# Altium PCB PCB2.PcbDoc
Units mm, origin at the board's own origin, x right, y up, seen from the top; angles counter-clockwise.
Board outline 32.64 x 44.58 mm, 2 copper layers (Top Layer, Bottom Layer), stack 1.1 mm thick; 13 components, 11 nets, 43 pads, 10 vias.
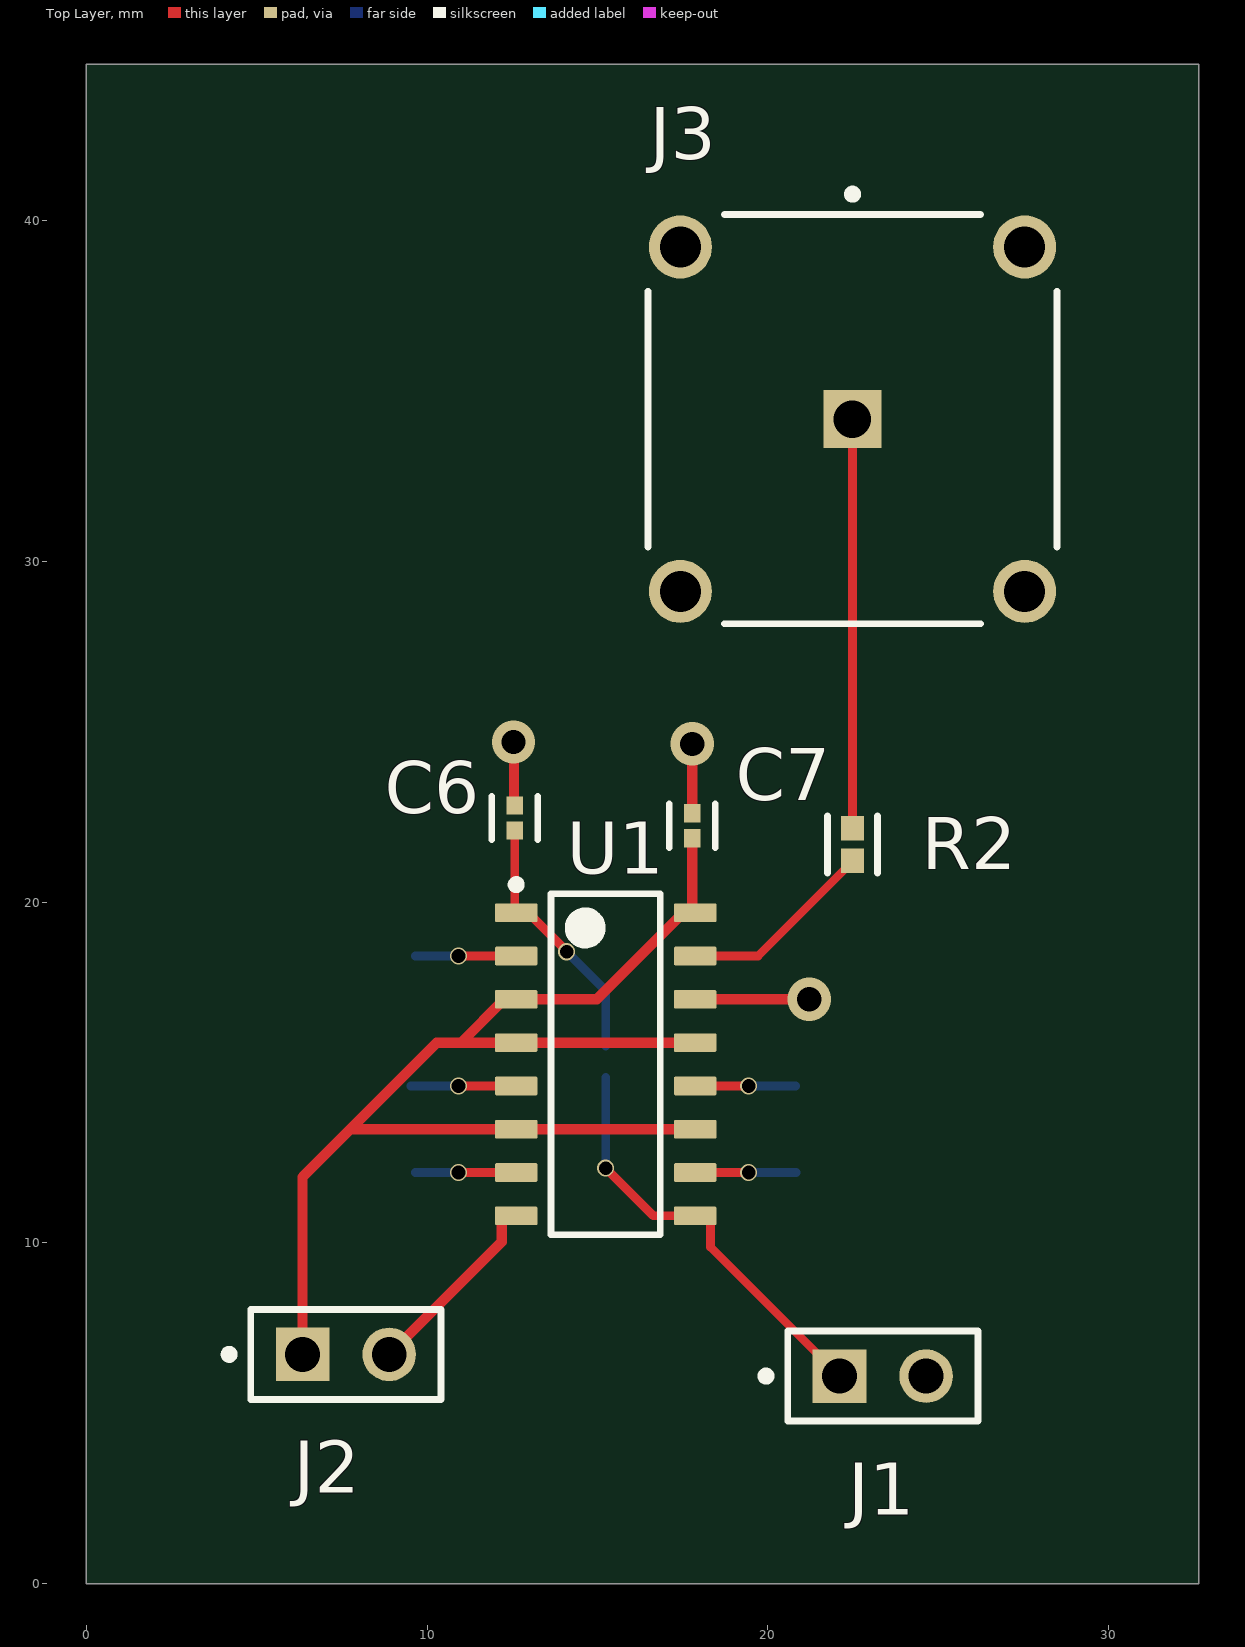
[diagram p0: Top Layer view]
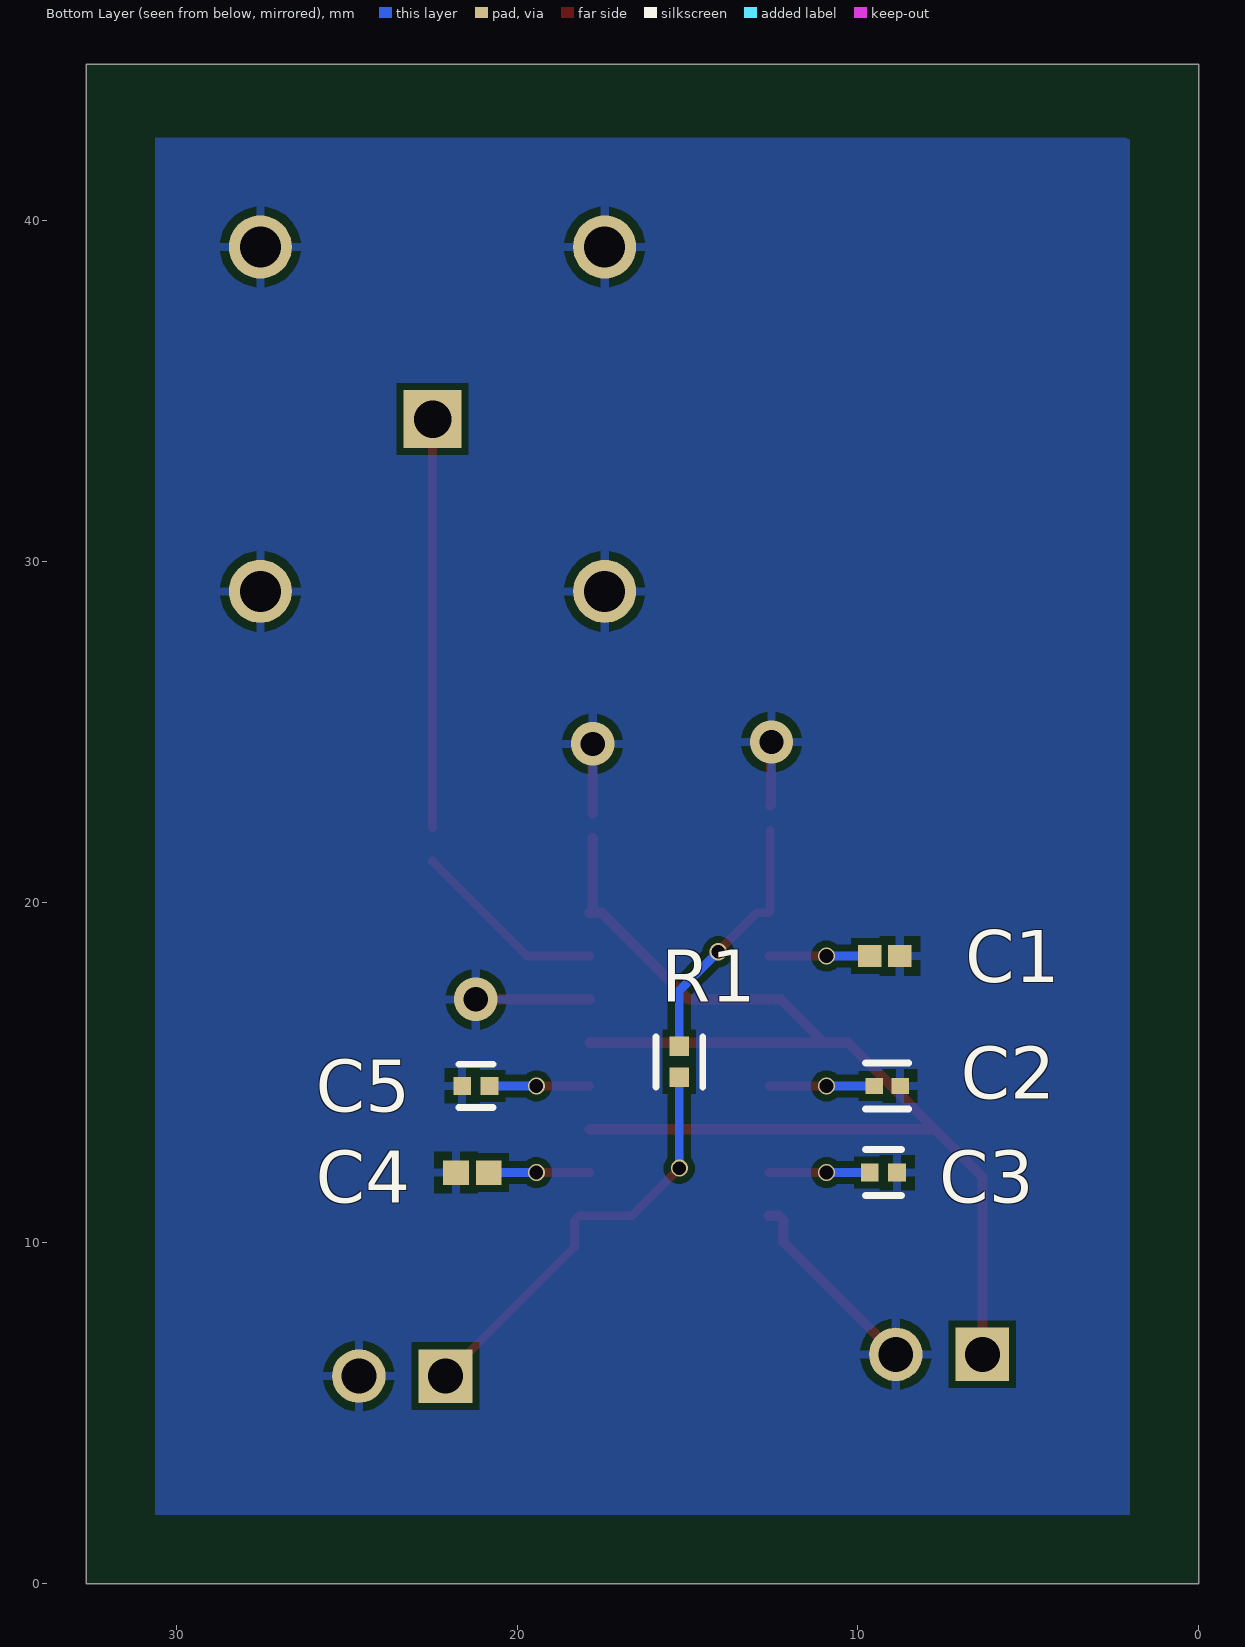
[diagram p1: Bottom Layer view, seen from below]
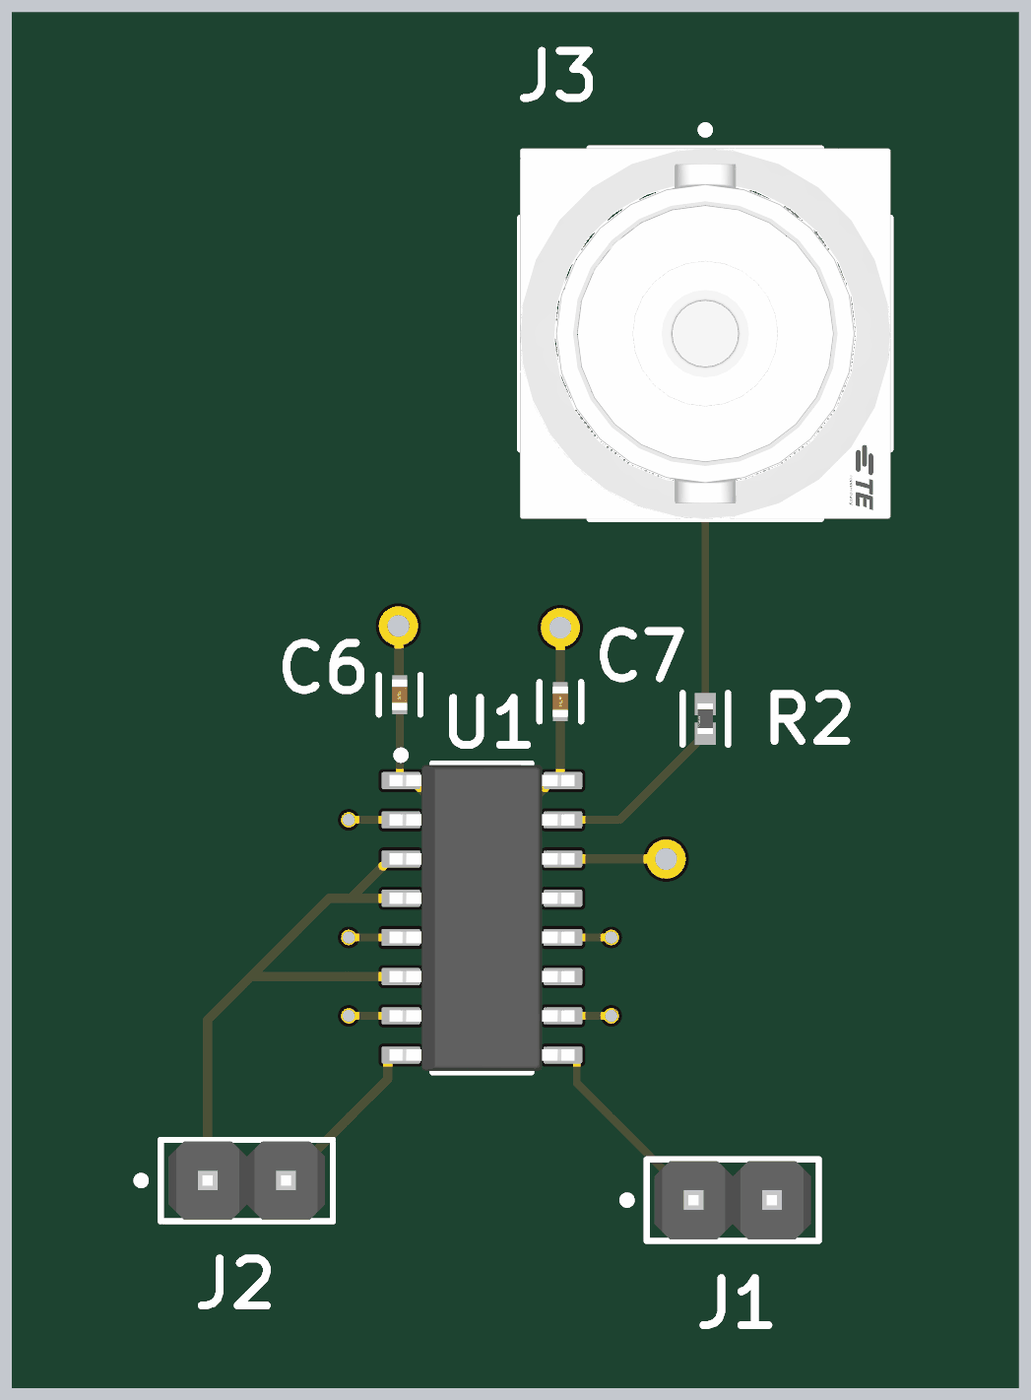
[diagram p2: 3D render of the assembled board from above, using the file's embedded part models]
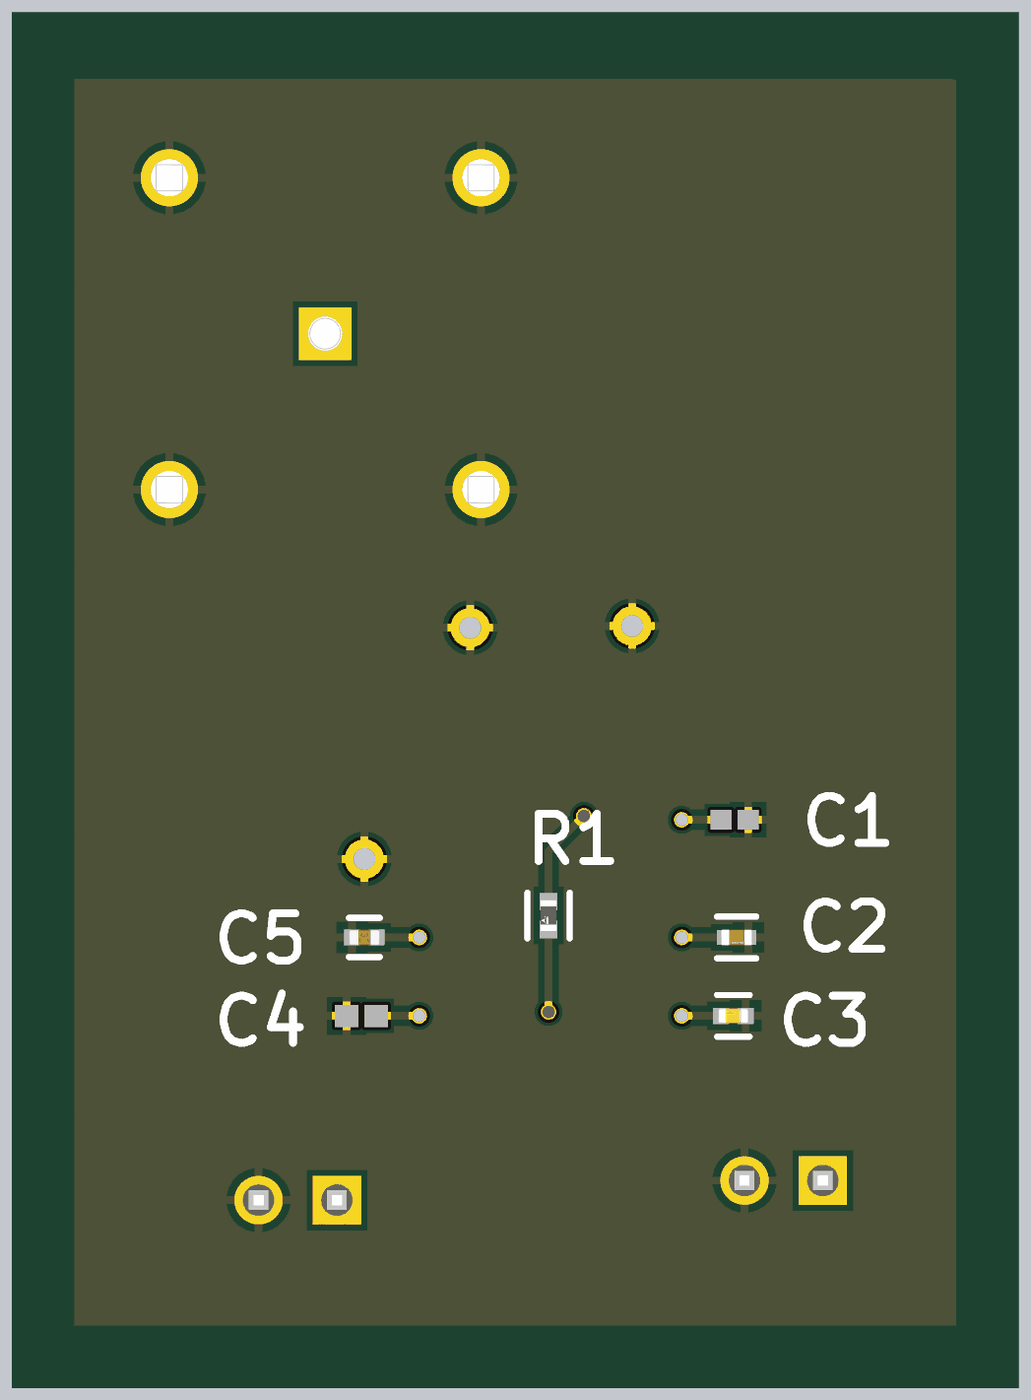
[diagram p3: 3D render of the assembled board from below, using the file's embedded part models]

## Layer stack, top to bottom
Top Solder: solder mask 0.05, SM-001, Dk 4
Top Layer: signal copper 0.1
Dielectric 1: dielectric 0.9, FR-4, Dk 4.8
Bottom Layer: signal copper 0.1
Bottom Solder: solder mask 0.05, SM-001, Dk 4

## Board outline
0,0 32.639,0 32.639,44.577 0,44.577

## Design rules (kind name [scope] priority, off if disabled: settings)
Clearance [All] p1: gap=0.15 ignorepadtopadclearanceinfootprint=FALSE
MinimumSolderMaskSliver [All] p1: minsoldermaskwidth=0.1
PolygonConnect [All] p1: connectstyle=Relief reliefconductorwidth=0.254 reliefentries=4 polygonreliefangle="90 Angle" airgapwidth=0.254
RoutingVias [All] p1: holewidth=0.4 width=0.5 viastyle="Through Hole" minholewidth=0.4 minwidth=0.5 maxholewidth=0.4 maxwidth=0.5
SolderMaskExpansion [All] p1: expansion=0.102 istentingtop=FALSE
SupplyNets "Schematic Supply Nets_2" [InNet('Clock')] p1: voltage=0.000
SupplyNets "Schematic Supply Nets_1" [InNet('GND')] p2: voltage=0.000
SupplyNets "Schematic Supply Nets" [InNet('+5V')] p3: voltage=0.000
Width Width_POW [(InNet('+5V') OR InNet('GND'))] p1: maxlimit=0.3 minlimit=0.2 preferedwidth=0.3
Width [All] p2: maxlimit=0.254 minlimit=0.254 preferedwidth=0.254
29 further rules are at their usual default settings.

## Components (designator, comment, footprint, x,y, rotation, side; value= is the part's Value field where it differs from the comment)
C1 "0402YC101JAT2A" CAPC1005X56X25NL10T15 9.212,18.415 r180 bottom
C2 "CL05C750JB5NNNC" FP-CL794-IPC_C 9.144,14.605 r180 bottom
C3 "CBR04C470F3GAC" FP-CBR04C-MFG 9.252,12.065 r0 bottom value="47 pF"
C4 "C0402T330J3GACTU" CAPC1005X55X30ML05T10 21.308,12.065 r0 bottom
C5 "C0402C200J3GACTU" FP-C0402-BB-MFG 21.209,14.605 r0 bottom value="20 pF"
C6 "C1005X7R1V104K050BB" FP-C1005-050-0_05-IPC_C 12.573,22.465 r90 top
C7 "C1005X7R1V104K050BB" FP-C1005-050-0_05-IPC_C 17.78,22.239 r270 top
J1 "M20-9990246" FP-M20-9990246-MFG 23.368,6.096 r0 top
J2 "M20-9990246" FP-M20-9990246-MFG 7.62,6.731 r0 top
J3 "1-1337445-0" FP-1-1337445-0-MFG 22.479,34.163 r270 top
R1 "MCS0402MD1002BE100" FP-MCS0402-IPC_B 15.24,15.313 r270 bottom
R2 "RC1005F102CS" FP-RC1005-IPC_A 22.479,21.688 r270 top
U1 "CD74HCT174MT" D0016A_L 15.24,15.24 r0 top

## Footprints (in the part's own frame and the unit in brackets; to place one, negate y for a bottom-side part, rotate by r counter-clockwise, add the part's x,y. Pads: shape width x height; smd on the part's side, far side on the other; paste and mask are expansions set on the pad)
CAPC1005X55X30ML05T10 [mm] "Chip Capacitor, 2-Leads, Body 1.00x0.50mm, IPC Low Density"
  rect 0.76x0.72 smd: 1(-0.48,0) 2(0.48,0)
  body extent -0.53,-0.28 0.53,0.27, height 0.55
CAPC1005X56X25NL10T15 [mm] "Chip Capacitor, 2-Leads, Body 1.00x0.50mm, IPC Medium Density"
  rect 0.68x0.64 smd: 1(-0.44,0) 2(0.44,0)
  body extent -0.55,-0.3 0.55,0.3, height 0.56
D0016A_L [mm] "SOIC, 16-Leads, Body 10x4mm, Pitch 1.27mm, IPC High Density"
  rrect18% 1.25x0.55 smd: 1(-2.625,4.445) 2(-2.625,3.175) 3(-2.625,1.905) 4(-2.625,0.635) 5(-2.625,-0.635) 6(-2.625,-1.905) 7(-2.625,-3.175) 8(-2.625,-4.445) 9(2.625,-4.445) 10(2.625,-3.175) 11(2.625,-1.905) 12(2.625,-0.635) 13(2.625,0.635) 14(2.625,1.905) 15(2.625,3.175) 16(2.625,4.445)
  silkscreen extent -2.75,-5 1.6,5.39, body extent -3,-4.95 3,4.95, height 1.59
FP-1-1337445-0-MFG [mm]
  rect 1.7x1.7 hole 1.1 paste-2539.97 mask+0: 1(0,0)
  round 1.85 hole 1.2 paste-2539.97 mask+0: 2(-5.05,5.05) 3(5.05,5.05) 4(-5.05,-5.05) 5(5.05,-5.05)
  silkscreen extent -6.72,-6 6,6, body extent -6.1,-6.1 6.1,6.1, height 0.25
FP-C0402-BB-MFG [mm]
  rect 0.52x0.52 smd paste+0 mask+0: 1(-0.4,0) 2(0.4,0)
  silkscreen extent -0.5,-0.64 0.5,0.64, body extent -0.5,-0.25 0.5,0.25, height 0.55
FP-C1005-050-0_05-IPC_C [mm]
  rect 0.539x0.472 smd paste+0 mask+0: 1(-0.367,0) 2(0.367,0)
  silkscreen extent -0.64,-0.67 0.64,0.67, body extent -0.74,-0.38 0.74,0.38, height 0.25
FP-CBR04C-MFG [mm]
  rect 0.52x0.52 smd paste+0 mask+0: 1(-0.4,0) 2(0.4,0)
  silkscreen extent -0.53,-0.68 0.53,0.67, body extent -0.5,-0.25 0.5,0.25, height 0.55
FP-CL794-IPC_C [mm]
  rect 0.515x0.472 smd paste+0 mask+0: 1(-0.379,0) 2(0.379,0)
  silkscreen extent -0.64,-0.67 0.64,0.67, body extent -0.5,-0.25 0.5,0.25, height 0.55
FP-M20-9990246-MFG [mm]
  rect 1.57x1.57 hole 1.02 paste-2539.97 mask+0: 1(-1.27,0)
  round 1.57 hole 1.02 paste-2539.97 mask+0: 2(1.27,0)
  silkscreen extent -3.55,-1.32 2.79,1.32, body extent -2.89,-1.42 2.89,1.42, height 0.25
FP-MCS0402-IPC_B [mm]
  rect 0.565x0.572 smd paste+0 mask+0: 1(-0.454,0) 2(0.454,0)
  silkscreen extent -0.74,-0.69 0.74,0.69, body extent -0.5,-0.25 0.5,0.25, height 0.37
FP-RC1005-IPC_A [mm]
  rect 0.715x0.672 smd paste+0 mask+0: 1(-0.479,0) 2(0.479,0)
  silkscreen extent -0.84,-0.74 0.84,0.74, body extent -0.5,-0.25 0.5,0.25, height 0.4

## Part data
C1: library part CMP-2008-02792-1, Manufacturer="AVX Interconnect / Elco", Parameter 1=100pF, Part Number=0402YC101JAT2A
C2: library part CMP-13271-003845-1, "Cap Ceramic 75pF 50V C0G ±5% SMD 0402 +125°C Paper T/R", Capacitance=75pF, Case Code (Imperial)=0402, Case Code (Metric)=1005, Dielectric=C0G, Max Operating Temperature=125°C, Min Operating Temperature=-55°C, Tolerance=5%, Voltage Rating=50V, Case/Package=0402, Depth=0.5mm, Height=0.5mm, Length=1mm, Mount="Surface Mount", Packaging="Tape and Reel", Radiation Hardening=No, Thickness=0.022inch, Voltage Rating (DC)=50V, Width=0.02inch
C3: library part CMP-03020-018522-1, "CAP CER 47PF 25V C0G/NP0 0402", Capacitance="47 pF", Manufacturer=KEMET, Package=CBR04C, Temperature="-55°C to +125°C", Temperature Characteristic=C0G, Temperature Coefficient=30ppm/°C, Temperature Range High=+125°C, Temperature Range Low=-55°C, Tolerance=0.01, Voltage Rating="25 V", Automotive=No, Category=Cap, ComponentLink2Description=Datasheet, ComponentLink2URL=https://content.kemet.com/datasheets/KEM_C1030_CBR_SMD.pdf, Device Class L1="Passive Components", Device Class L2=Capacitors, Device Class L3="Ceramic Capacitors", Digikey Description="CAP CER 47PF 25V C0G/NP0 0402", Height=0.55mm, Ipc Land Pattern Name=CAPC10050X50, Lead Free=Yes, Manufacturer Part Number=CBR04C470F3GAC, Material=Ceramic, Mouser Description="Cap Ceramic 47pF 25V C0G 1% SMD 0402 125°C Punched Paper T/R", Octopart=https://octopart.com/cbr04c470f3gac-kemet-30609232, RoHS=TRUE
C4: library part CMP-2008-03465-1, Manufacturer=Kemet, Parameter 1=33pF, Part Number=C0402T330J3GACTU
C5: library part CMP-1034-00885-3, "CAP CER 20PF 25V NP0 0402", Capacitance="20 pF", Manufacturer=Kemet, Package=C0402-BB, Temperature="-55°C to +125°C", Temperature Characteristic=C0G, Temperature Coefficient=15%, Temperature Range High=+125°C, Temperature Range Low=-55°C, Tolerance=0.05, Voltage Rating="25 V", Automotive=No, Category=Cap, ComponentLink2Description=Datasheet, ComponentLink2URL=https://content.kemet.com/datasheets/KEM_C1002_X7R_SMD.pdf, Device Class L1="Passive Components", Device Class L2=Capacitors, Device Class L3="Ceramic Capacitors", Digikey Description="CAP CER 20PF 25V NP0 0402", Height=0.55mm, Ipc Land Pattern Name=CAPC10050X50, Lead Free=Yes, Manufacturer Part Number=C0402C200J3GACTU, Material=Ceramic, Mouser Description="Capacitor, Ceramic, 20Pf, 25Vdc, 5-% Tol, 5+% Tol, C0g-Tc Code, -30, 30Ppm-Tc Rohs Compliant: Yes", Octopart=https://octopart.com/c0402c200j3gactu-kemet-14400860, RoHS=TRUE
C6 C7: library part CMP-08246-006246-1, "Multilayer Ceramic Capacitors 100nF ±10% 35V X7R SMD 0402", Capacitance=100nF, Case Code (Imperial)=0402, Case Code (Metric)=1005, Dielectric=X7R, Dielectric Material=Ceramic, Max Operating Temperature=125°C, Min Operating Temperature=-55°C, Package Quantity=1, Tolerance=10%, Voltage=35V, Case/Package=0402, Construction=Flat, Depth=0.5mm, Dissipation Factor=5%, Height=0.5mm, Lead Free="Lead Free", Length=1mm, Mount="Surface Mount", Packaging="Tape and Reel", REACH SVHC="No SVHC", RoHS Compliant=Yes, Series=C, Termination=SMD/SMT, Thickness=0.022inch, Voltage Rating=35V, Voltage Rating (DC)=35V, Weight=2.3E-05oz, Width=0.02inch
J1 J2: library part CMP-15831-000009-1, "CONN HEADER VERT 2POS 2.54MM", Current Rating=3A, Manufacturer=Harwin, Temperature="-40°C to +105°C", Temperature Range High=+105°C, Temperature Range Low=-40°C, Automotive=No, Category=Conn, ComponentLink2Description=Datasheet, ComponentLink2URL=https://cdn.harwin.com/pdfs/M20-999.pdf, Conn Gender=Male, Conn Orientation=Vertical, Contact Material=Tin,Nickel, Device Class L1=Connectors, Device Class L2="Headers and Wire Housings", Device Class L3=unset, Digikey Description="CONN HEADER VERT 2POS 2.54MM", Height=8.99mm, Lead Free=Yes, Manufacturer Part Number=M20-9990246, Mouser Description="2.54mm (0.1\") Pitch SIL Vertical PC Tail Pin Header, 6.1mm mating pin height, tin, 2 contacts", Number of Contacts=2, Number of Rows=1, Octopart=https://octopart.com/m20-9990246-harwin-2590635, Package=M20-9990246, Pitch=2.54mm, RoHS=TRUE
J3: library part CMP-03357-000006-1, "CONN BNC JACK STR 50 OHM PCB", Dielectric Material=PTFE, Frequency=4GHz, Insulation Resistance=5GR, Max Operating Temperature=165°C, Min Operating Temperature=-65°C, Operating Frequency="0 to 4Hz", Package Quantity=50, Body Material=Brass, Body Plating=Silver, Connector Type=BNC, Contact Material=Brass, Contact Plating=Silver, Depth=12mm, ELV=Compliant, Fastening Type=Bayonet, Gender=Female, Impedance=50R, Insulation Material=Polytetrafluoroethylene, Length=12mm, Material=Brass, Max Frequency=4GHz, Mount="Through Hole", Number of Positions=1, Orientation=Straight, Packaging=Bag, PCB Mount Retention=With, PCB Mounting Orientation=Vertical, PCB Thickness=0.126inch, Radiation Hardening=No, RoHS Compliant=Yes, Sealable="No (Without)", Series=BNC, Termination=Solder
R1: library part CMP-02407-001558-1, "RES SMD 1.2K OHM 1% 1/10W 0402", Case Code (Imperial)=0402, Case Code (Metric)=1005, Max Operating Temperature=155°C, Min Operating Temperature=-55°C, Power Rating=63mW, Resistance=10kR, Temperature Coefficient=25ppm/°C, Tolerance=0.1%, Voltage Rating=50V, Case/Package=0402, Composition="Thin Film", Contact Plating=Tin, Height=0.32mm, Lead Free="Lead Free", Length=1mm, Packaging="Tape and Reel", Weight=2.1E-05oz, Width=0.5mm
R2: library part CMP-13261-004451-1, "Res Thick Film 0402 1kΩ 1% 0.063W ±100ppm/°C Molded SMD T/R", Case Code (Imperial)=0402, Case Code (Metric)=1005, Max Operating Temperature=155°C, Max Power Dissipation=63mW, Min Operating Temperature=-55°C, Resistance=1kR, Temperature Coefficient=100ppm/°C, Tolerance=1%, Voltage Rating (DC)=50V, Case/Package=0402, Composition="Thick Film", Contact Plating=Tin, Depth=0.5mm, Features="Moisture Resistant", Height=0.016inch, Lead Free="Lead Free", Length=1mm, Military Standard=Not, Number of Terminations=2, Packaging="Tape and Reel", Radiation Hardening=No, Width=0.02inch
U1: library part CMP-1619-00076-2, "High Speed CMOS Logic Hex D-Type Flip-Flop with Reset, D0016A, SMALL T&R", F @ Nom Voltage(Max)(Mhz)=25, Generic Part Number=CD74HCT174, ICC @ Nom Voltage(Max)(mA)=0.08, Manufacturer="Texas Instruments", Operating Temperature Range(C)="-55 to 125", Rating=Catalog, tpd @ Nom Voltage(Max)(ns)=50, Voltage(Nom)(V)=5, 3-State Output=No, Bits(#)=6, Code_JEDEC="MS-012 variation AC", DatasheetVersion=SCHS159C, Input Type=TTL, Output Drive (IOL/IOH)(Max)(mA)=4/-4, Output Logic=Non-inverted, Output Type=CMOS, PackageReference=D0016A, Schmitt Trigger=No, Technology Family=HCT, VCC(Max)(V)=5.5, VCC(Min)(V)=4.5

## Via types
v1: diameter 0.5, hole 0.4, Top Layer to Bottom Layer, 7 vias
v2: diameter 1.27, hole 0.711, Top Layer to Bottom Layer, 3 vias

## Nets (pads, with @x,y where several pads share a name; then routed paths per layer and width w, separated by ;. In a path a pad name is that pad's centre, name@x,y a point inside that pad or via, vN(x,y) a via of type N, cw(c..) or ccw(c..) an arc to the next point about the centre after c; other vN are vias at no path point)
+5V: C7.2 J2.1 U1.3 U1.4 U1.6 U1.11 U1.13 U1.16 | length 39
  Top Layer w0.3: J2.1 6.35,11.938 7.747,13.335 ; U1.3@12.44,17.145 12.265,17.145 10.995,15.875 ; U1.3 14.975,17.145 17.515,19.685 U1.16 17.78,19.77 C7.2 ; U1.11 U1.6 7.747,13.335 ; U1.13 U1.4 10.995,15.875 ; 7.747,13.335 10.287,15.875 10.995,15.875
Clock: J1.1 R1.2 U1.9 | length 12.5
  Top Layer w0.254: v1(15.24,12.192) 16.637,10.795 U1.9 18.165,10.795 18.313,10.647 18.313,9.881 J1.1
  Bottom Layer w0.254: v1(15.24,12.192) R1.2
COAX: R2.2 U1.15 | length 5.8
  Top Layer w0.254: U1.15 19.706,18.415 22.479,21.188 R2.2
GND: C1.2 C2.2 C3.1 C4.2 C5.2 C6.2 C7.1 J1.2 J2.2 J3.2 J3.3 J3.4 J3.5 U1.8 U1.14 | length 13
  Top Layer w0.3: J2.2 12.189,10.03 12.189,10.67 12.314,10.795 U1.8 ; v2(12.533,24.694) 12.553,24.675 12.553,22.851 C6.2 ; C7.1 v2(17.78,24.638) ; U1.14 v2(21.209,17.145)
NetC1_1: C1.1 U1.2 | length 3
  Top Layer w0.254: v1(10.922,18.415) U1.2
  Bottom Layer w0.254: C1.1 v1(10.922,18.415)
NetC2_1: C2.1 U1.5 | length 3.1
  Top Layer w0.254: v1(10.922,14.605) U1.5
  Bottom Layer w0.254: C2.1 v1(10.922,14.605)
NetC3_2: C3.2 U1.7 | length 3
  Top Layer w0.254: v1(10.922,12.065) U1.7
  Bottom Layer w0.254: C3.2 v1(10.922,12.065)
NetC4_1: C4.1 U1.10 | length 3
  Top Layer w0.254: U1.10 v1(19.431,12.065)
  Bottom Layer w0.254: v1(19.431,12.065) C4.1
NetC5_1: C5.1 U1.12 | length 2.9
  Top Layer w0.254: U1.12 v1(19.431,14.605)
  Bottom Layer w0.254: v1(19.431,14.605) C5.1
NetJ3_1: J3.1 R2.1 | length 12
  Top Layer w0.254: R2.1 J3.1
Reset: C6.1 R1.1 U1.1 | length 7.6
  Top Layer w0.254: C6.1 12.573,19.727 U1.1 12.965,19.685 14.097,18.553 v1(14.097,18.542)
  Bottom Layer w0.254: v1(14.097,18.542) 15.24,17.399 R1.1

## Polygon pours and split planes (outlines as drawn)
GND on Bottom Layer "GND_L02_P000" (solid, pour order 0): 2.032,42.545 2.159,42.418 30.607,42.418 30.607,2.032 2.032,2.032